# Altium PCB M2maleDouble_M2female.PcbDoc
Units mm, origin at the board's own origin, x right, y up, seen from the top; angles counter-clockwise.
Board outline 46 x 80 mm, 2 copper layers (Top Layer, Bottom Layer), stack 0.87 mm thick; 3 components, 15 nets, 208 pads, 217 vias.
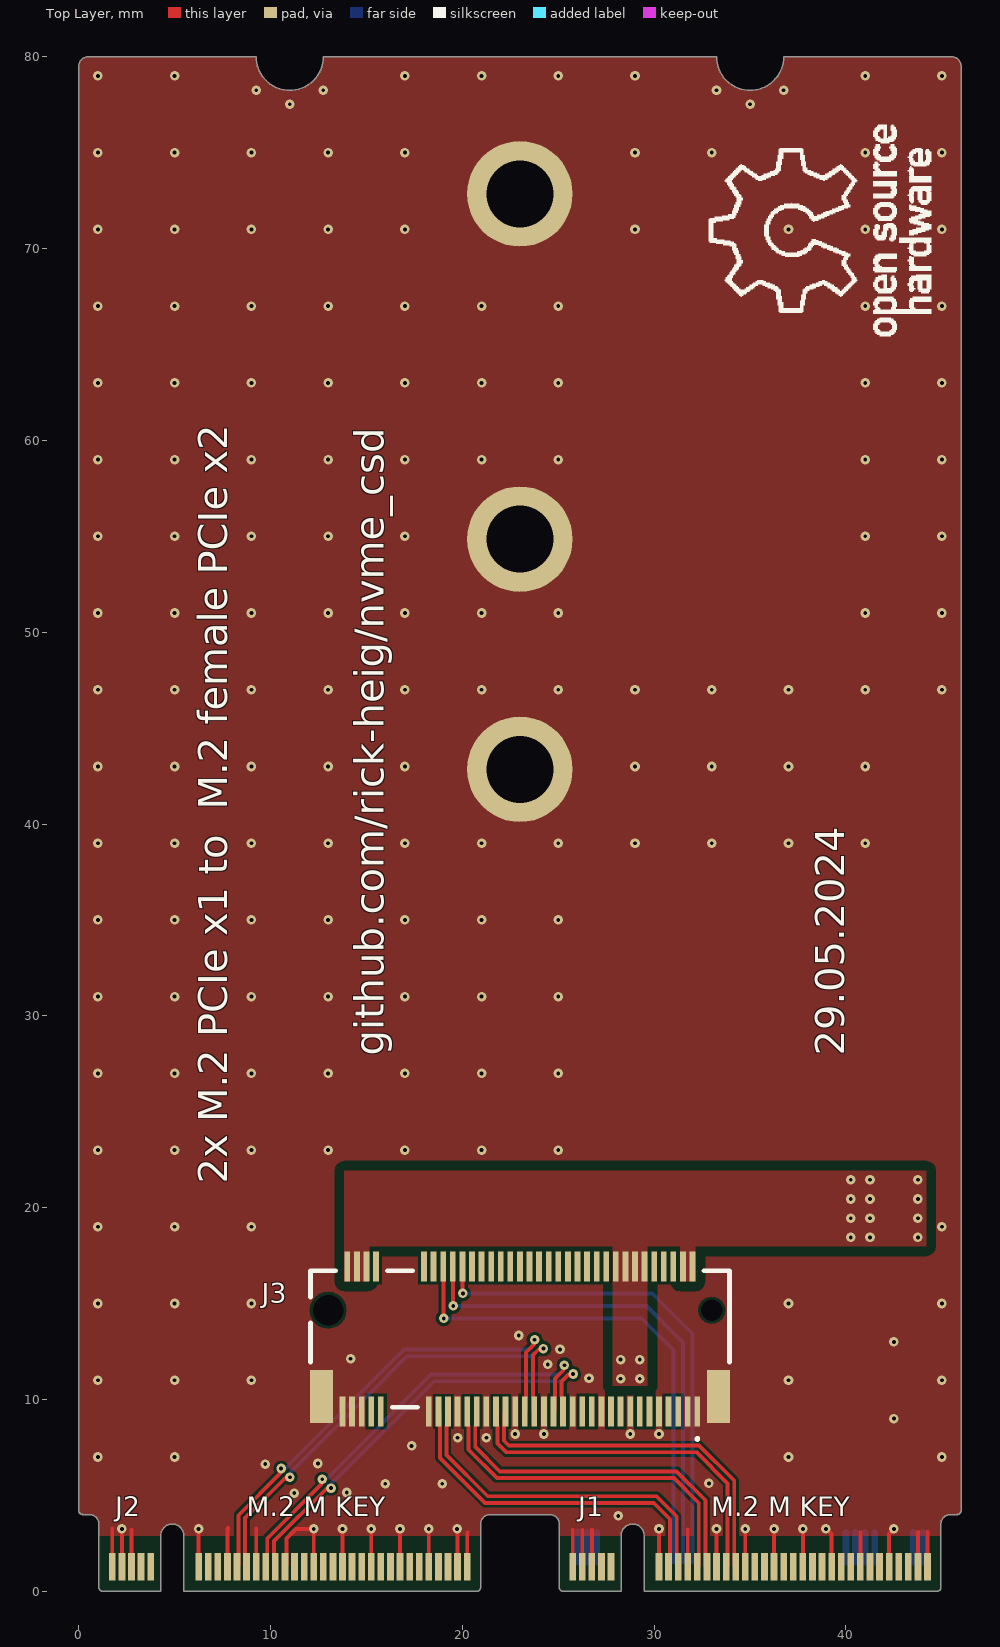
[diagram p0: Top Layer view]
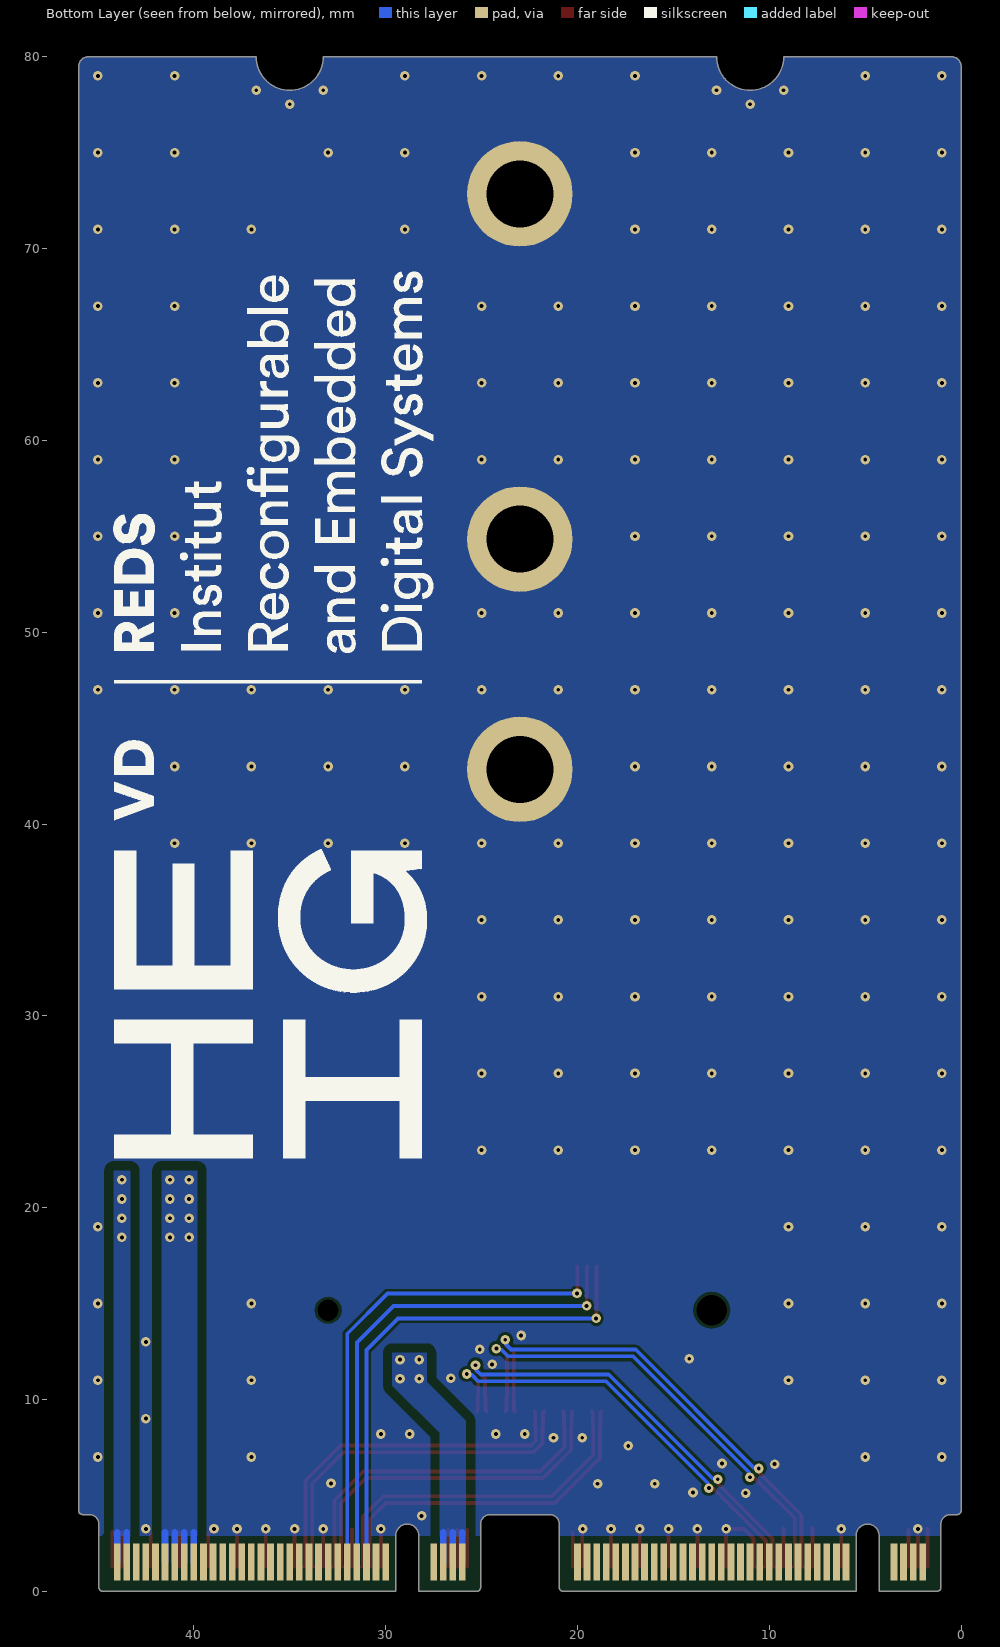
[diagram p1: Bottom Layer view, seen from below]

## Layer stack, top to bottom
Top Solder: solder mask 0.0254, Solder Resist, Dk 3.5
Top Layer: signal copper 0.035
Dielectric 1: dielectric 0.8, FR-4, Dk 4.8
Bottom Layer: signal copper 0.035
Bottom Solder: solder mask 0.0254, Solder Resist, Dk 3.5

## Board outline
1.05,0.2 ccw(c1.25,0.2) 1.25,0 4.275,0 4.275,2.9 cw(c4.875,2.9) 4.875,3.5 cw(c4.875,2.9) 5.475,2.9 5.475,0 20.75,0 ccw(c20.75,0.2) 20.95,0.2 20.95,3.5 cw(c21.45,3.5) 21.45,4 24.55,4 cw(c24.55,3.5) 25.05,3.5 25.05,0.2 ccw(c25.25,0.2) 25.25,0 28.275,0 28.275,2.9 cw(c28.875,2.9) 28.875,3.5 cw(c28.875,2.9) 29.475,2.9 29.475,0 44.75,0 ccw(c44.75,0.2) 44.95,0.2 44.95,3.5 cw(c45.45,3.5) 45.45,4 45.8,4 ccw(c45.8,4.2) 46,4.2 46,79.5 ccw(c45.5,79.5) 45.5,80 36.75,80 cw(c35,80) 33.25,80 12.75,80 cw(c11,80) 9.25,80 0.5,80 ccw(c0.5,79.5) 0,79.5 0,4.2 ccw(c0.2,4.2) 0.2,4 0.55,4 cw(c0.55,3.5) 1.05,3.5

## Design rules (kind name [scope] priority, off if disabled: settings)
BoardOutlineClearance [All] p1: gap=0 ignorepadtopadclearanceinfootprint=FALSE
Clearance Clearance_1 [All] p1: gap=0.15 ignorepadtopadclearanceinfootprint=FALSE except(0.149: Track-SMDPad SMDPad-SMDPad SMDPad-Poly; 0.5: Poly-Poly)
Clearance Clearance_DIFF [InAnyDifferentialPair] p2: gap=0.15 ignorepadtopadclearanceinfootprint=FALSE
Clearance Clearance_TOP [InNamedPolygon('GND-TOP')] p3: gap=0.15 ignorepadtopadclearanceinfootprint=FALSE
Clearance Clearance_BOTTOM [InNamedPolygon('GND-BOTTOM')] p4: gap=0.15 ignorepadtopadclearanceinfootprint=FALSE
ComponentClearance [All] p1: gap=0.254 collisioncheckmode=3 verticalgap=0.254 showdistances=FALSE donotcheckwithout3dbody=TRUE
DiffPairsRouting [All] p1: maxlimit=0.15 minlimit=0.15 mostfreqgap=0.15 toplayer_minwidth=0.2 toplayer_maxwidth=0.2 toplayer_prefwidth=0.2 bottomlayer_minwidth=0.2 bottomlayer_maxwidth=0.2 bottomlayer_prefwidth=0.2 impedanceprofiledriven=TRUE impedanceprofileid={70AA0EFC-7519-4A6E-A40E-C9539EC47755} impedanceprofilevalue=100.000000 maxuncoupledlength=12.7
HoleSize [All] p1: absolutevalues=TRUE maxlimit=5 minlimit=0.025 maxpercent=80.000 minpercent=20.000
HoleToHoleClearance [All] p1: gap=0.15 allowstackedmicrovias=TRUE
Length [All] p1: maxlimit=2540 minlimit=0
MatchedLengths MatchLengths_xSignals_J2_J1 [All] p1: tolerance=0.05 checknetsindiffpair=TRUE checkdiffpairvsdiffpair=FALSE checkxsignals=FALSE checkothers=FALSE
MinimumSolderMaskSliver [All] p1: minsoldermaskwidth=0.075
PlaneConnect [All] p1: planeconnectstyle=Direct reliefexpansion=0.508 reliefentries=4 reliefconductorwidth=0.254 reliefairgap=0.254
PolygonConnect PolygonConnect_6 [All vs IsNamedPolygon('Top-3.3V')] p1: connectstyle=Direct reliefconductorwidth=0.254 reliefentries=4 polygonreliefangle="90 Angle" airgapwidth=0.254
PolygonConnect PolygonConnect_5 [All vs IsNamedPolygon('Top-GND')] p2: connectstyle=Direct reliefconductorwidth=0.254 reliefentries=4 polygonreliefangle="90 Angle" airgapwidth=0.254
PolygonConnect PolygonConnect_4 [All vs IsNamedPolygon('Bottom-3.3V-003')] p3: connectstyle=Direct reliefconductorwidth=0.254 reliefentries=4 polygonreliefangle="90 Angle" airgapwidth=0.254
PolygonConnect PolygonConnect_3 [All vs IsNamedPolygon('Bottom-3.3V-002')] p4: connectstyle=Direct reliefconductorwidth=0.254 reliefentries=4 polygonreliefangle="90 Angle" airgapwidth=0.254
PolygonConnect PolygonConnect_2 [All vs IsNamedPolygon('Bottom-GND')] p5: connectstyle=Direct reliefconductorwidth=0.254 reliefentries=4 polygonreliefangle="90 Angle" airgapwidth=0.254
PolygonConnect PolygonConnect_1 [All vs IsNamedPolygon('Bottom-3.3V-001')] p6: connectstyle=Direct reliefconductorwidth=0.254 reliefentries=4 polygonreliefangle="90 Angle" airgapwidth=0.254
PolygonConnect [All] p7: connectstyle=Relief reliefconductorwidth=0.254 reliefentries=4 polygonreliefangle="90 Angle" airgapwidth=0.254
RoutingVias [All] p1: holewidth=0.2 width=0.5 viastyle="Through Hole" minholewidth=0.15 minwidth=0.4 maxholewidth=0.4 maxwidth=0.8
SilkToSolderMaskClearance [IsPad] p1: minsilkscreentomaskgap=0.2 clearancetoexposedcopper=TRUE
SolderMaskExpansion [All] p1: expansion=0.102 istentingtop=FALSE
SupplyNets "Schematic Supply Nets_1" [InNet('3.3V')] p1: voltage=0.000
SupplyNets "Schematic Supply Nets" [InNet('GND')] p2: voltage=0.000
Width [All] p1: maxlimit=0.4 minlimit=0.1 preferedwidth=0.2
23 further rules are at their usual default settings.

## Classes and differential pairs
differential pair PET1: +PET1_P -PET1_N
differential pair PET0: +PET0_P -PET0_N
differential pair PER1: +PER1_P -PER1_N
differential pair PER0: +PER0_P -PER0_N
differential pair CLK: +CLK_P -CLK_N

## Components (designator, comment, footprint, x,y, rotation, side; value= is the part's Value field where it differs from the comment)
J1 "NGFF_M_V2" M.2-M-KEY-2280-V2 35,0 r0 top
J2 "NGFF_M_V2" M.2-M-KEY-2280-V2 11,0 r0 top locked
J3 "APCI0113-P001A" APCI0113P001A 23,13.15 r180 top locked

## Footprints (in the part's own frame and the unit in brackets; to place one, negate y for a bottom-side part, rotate by r counter-clockwise, add the part's x,y. Pads: shape width x height; smd on the part's side, far side on the other; paste and mask are expansions set on the pad)
APCI0113P001A [mm]
  rect 0.3x1.55 smd paste+0 mask+0.051: 1(-9.25,3.775) 2(-9,-3.775) 3(-8.75,3.775) 4(-8.5,-3.775) 5(-8.25,3.775) 6(-8,-3.775) 7(-7.75,3.775) 8(-7.5,-3.775) 9(-7.25,3.775) 10(-7,-3.775) 11(-6.75,3.775) 12(-6.5,-3.775) 13(-6.25,3.775) 14(-6,-3.775) 15(-5.75,3.775) 16(-5.5,-3.775) 17(-5.25,3.775) 18(-5,-3.775) 19(-4.75,3.775) 20(-4.5,-3.775) 21(-4.25,3.775) 22(-4,-3.775) 23(-3.75,3.775) 24(-3.5,-3.775) 25(-3.25,3.775) 26(-3,-3.775) 27(-2.75,3.775) 28(-2.5,-3.775) 29(-2.25,3.775) 30(-2,-3.775) 31(-1.75,3.775) 32(-1.5,-3.775) 33(-1.25,3.775) 34(-1,-3.775) 35(-0.75,3.775) 36(-0.5,-3.775) 37(-0.25,3.775) 38(0,-3.775) 39(0.25,3.775) 40(0.5,-3.775) 41(0.75,3.775) 42(1,-3.775) 43(1.25,3.775) 44(1.5,-3.775) 45(1.75,3.775) 46(2,-3.775) 47(2.25,3.775) 48(2.5,-3.775) 49(2.75,3.775) 50(3,-3.775) 51(3.25,3.775) 52(3.5,-3.775) 53(3.75,3.775) 54(4,-3.775) 55(4.25,3.775) 56(4.5,-3.775) 57(4.75,3.775) 58(5,-3.775) 67(7.25,3.775) 68(7.5,-3.775) 69(7.75,3.775) 70(8,-3.775) 71(8.25,3.775) 72(8.5,-3.775) 73(8.75,3.775) 74(9,-3.775) 75(9.25,3.775)
  round 0.55 hole 1.1 unplated: MH1(-10,-1.5)
  round 0.8 hole 1.6 unplated: MH2(10,-1.5)
  rect 1.2x2.75 smd paste+0 mask+0.051: MP1(-10.35,3) MP2(10.35,3)
  silkscreen extent -10.92,-3.56 10.92,5.26
M.2-M-KEY-2280-V2 [mm] "M.2-KEY-M"
  rect 0.35x1.45 smd mask+0: 1(9.25,1.275) 3(8.75,1.275) 5(8.25,1.275) 7(7.75,1.275) 9(7.25,1.275) 11(6.75,1.275) 13(6.25,1.275) 15(5.75,1.275) 17(5.25,1.275) 19(4.75,1.275) 21(4.25,1.275) 23(3.75,1.275) 25(3.25,1.275) 27(2.75,1.275) 29(2.25,1.275) 31(1.75,1.275) 33(1.25,1.275) 35(0.75,1.275) 37(0.25,1.275) 39(-0.25,1.275) 41(-0.75,1.275) 43(-1.25,1.275) 45(-1.75,1.275) 47(-2.25,1.275) 49(-2.75,1.275) 51(-3.25,1.275) 53(-3.75,1.275) 55(-4.25,1.275) 57(-4.75,1.275) 67(-7.25,1.275) 69(-7.75,1.275) 71(-8.25,1.275) 73(-8.75,1.275) 75(-9.25,1.275)
  rect 0.35x1.95 smd far side mask+0: 2(9,1.525) 4(8.5,1.525) 6(8,1.525) 8(7.5,1.525) 10(7,1.525) 12(6.5,1.525) 14(6,1.525) 16(5.5,1.525) 18(5,1.525) 20(4.5,1.525) 22(4,1.525) 24(3.5,1.525) 26(3,1.525) 28(2.5,1.525) 30(2,1.525) 32(1.5,1.525) 34(1,1.525) 36(0.5,1.525) 38(0,1.525) 40(-0.5,1.525) 42(-1,1.525) 44(-1.5,1.525) 46(-2,1.525) 48(-2.5,1.525) 50(-3,1.525) 52(-3.5,1.525) 54(-4,1.525) 56(-4.5,1.525) 58(-5,1.525) 68(-7.5,1.525) 70(-8,1.525) 72(-8.5,1.525) 74(-9,1.525)

## Part data
J3: "Connector", Manufacturer_Name=LOTES, Datasheet Link=https://www.lcsc.com/datasheet/lcsc_datasheet_2010161204_LOTES-APCI0113-P001A_C841669.pdf, Height=4.8mm, Manufacturer_Part_Number=APCI0113-P001A

## Free pads (board coordinates)
  round 5.5 hole 3.5: 2(23,42.85) 2(23,54.85) 2(23,72.85)

## Via types
v1: diameter 0.5, hole 0.2, Top Layer to Bottom Layer, tented both sides, 217 vias

## Nets (pads, with @x,y where several pads share a name; then routed paths per layer and width w, separated by ;. In a path a pad name is that pad's centre, name@x,y a point inside that pad or via, vN(x,y) a via of type N, cw(c..) or ccw(c..) an arc to the next point about the centre after c; other vN are vias at no path point)
3.3V: J1.2 J1.4 J1.12 J1.14 J1.16 J1.18 J1.70 J1.72 J1.74 J3.2 J3.4 J3.12 J3.14 J3.16 J3.18 J3.70 J3.72 J3.74 | length 13.9
  Bottom Layer w0.35: J1.74 26,3.075 ; J1.72 26.5,3.075 ; J1.70 27,3.075 ; J1.18 40,3.075 ; J1.16 40.5,3.075 ; J1.14 41,3.075 ; J1.12 41.5,3.075 ; J1.4 43.5,3.075 ; J1.2 44,3.075
  other v1: 28.25,11.075 29.25,11.075 28.25,12.075 29.25,12.075 40.25,18.45 41.25,18.45 43.75,18.45 40.25,19.45 41.25,19.45 43.75,19.45 40.25,20.45 41.25,20.45 43.75,20.45 40.25,21.45 41.25,21.45 43.75,21.45
CLK_N: J1.53 J3.53 | length 18.3
  Top Layer w0.2: J3.53 19.2,9.325 19.2,8.608 19.175,8.583 19.175,7.1 21.325,4.95 30.125,4.95 31.178,3.897 31.178,2.827 31.175,2.824 31.175,2.104 31.175,1.35 J1.53
CLK_P: J1.55 J3.55 | length 18.3
  Top Layer w0.2: J3.55 18.8,9.325 18.8,8.608 18.825,8.583 18.825,6.955 21.18,4.6 29.98,4.6 30.828,3.753 30.828,2.972 30.825,2.969 30.825,2.104 30.825,1.35 J1.55
CLKREQ: J1.52 J3.52 | length 26.3
  Top Layer w0.2: J3.52 19.513,16.912 19.513,14.887 v1(19.525,14.875)
  Bottom Layer w0.2: v1(19.525,14.875) 29.6,14.875 31.5,12.975 J1.52
GND: J1.1 J1.3 J1.9 J1.15 J1.21 J1.27 J1.33 J1.39 J1.45 J1.51 J1.57 J1.71 J1.73 J1.75 J2.1 J2.3 J2.9 J2.15 J2.21 J2.27 J2.33 J2.39 J2.45 J2.51 J2.57 J2.71 J2.73 J2.75 J3.1 J3.3 J3.9 J3.15 J3.21 J3.27 J3.33 J3.39 J3.45 J3.51 J3.57 J3.71 J3.73 J3.75 J3.MP1 J3.MP2 pad.2 | length 55.5
  Top Layer w0.2: J2.75 1.75,3.275 ; J2.73 2.25,3.15 v1@2.275,3.175 ; J2.71 2.75,3.2 ; v1@6.2,3.425 6.25,3.375 J2.57 ; J2.51 7.75,3.25 7.775,3.275 7.775,3.3 ; J2.45 9.25,3.275 ; J2.39 10.825,1.35 10.825,2.75 11.325,3.25 v1(12.25,3.25) J2.33 ; J2.27 v1@13.75,3.275 ; v1@15.225,3.225 15.25,3.2 J2.21 ; v1@16.65,3.1 16.75,3 J2.15 ; J2.9 v1@18.25,3.125 ; v1@19.725,3.125 19.75,3.1 J2.3 ; J2.1 20.25,3.05 20.275,3.075 ; J1.75 25.75,3.2 ; J1.73 26.25,3.2 ; J1.71 26.75,3.2 ; v1@30.175,3.2 30.25,3.125 J1.57 ; J1.51 31.75,3.225 ; J1.45 v1@33.25,3.25 ; v1@34.65,3.15 34.75,3.05 J1.39 ; J1.33 v1@36.25,3.15 ; J1.27 v1@37.75,3.2 ; v1(38.95,3.25) 38.983,3.25 39.25,2.983 J1.21 ; J1.15 40.75,3.075 ; J1.9 42.25,2.983 42.5,3.233 v1(42.5,3.25) ; J1.3 43.75,3.1 ; J1.1 44.25,3.1
  other v1: 2.25,3.25 6.25,3.25 13.75,3.25 15.25,3.25 16.75,3.25 18.25,3.25 19.725,3.25 30.25,3.25 33.25,3.25 34.75,3.25 36.25,3.25 37.75,3.25 28.125,3.925 11.235,5.115 13.975,5.15 15.975,5.6 18.95,5.6 32.85,5.625 9.725,6.625 12.465,6.66 1,7 5,7 37,7 45,7 17.35,7.575 19.75,8 21.25,8 22.75,8.2 24.25,8.2 28.75,8.2 30.25,8.2 42.5,9 1,11 5,11 9,11 37,11 45,11 26.6,11.1 24.45,11.825 14.175,12.125 25.09,12.61 42.5,13 22.94,13.335 1,15 5,15 9,15 37,15 45,15 1,19 5,19 9,19 45,19 1,23 5,23 9,23 13,23 17,23 21,23 25,23 1,27 5,27 9,27 13,27 17,27 21,27 25,27 1,31 5,31 9,31 13,31 17,31 21,31 25,31 1,35 5,35 9,35 13,35 17,35 21,35 25,35 1,39 5,39 9,39 13,39 17,39 21,39 25,39 29,39 33,39 37,39 41,39 1,43 5,43 9,43 13,43 17,43 29,43 33,43 37,43 41,43 1,47 5,47 9,47 13,47 17,47 21,47 25,47 29,47 33,47 37,47 41,47 45,47 1,51 5,51 9,51 13,51 17,51 21,51 25,51 41,51 45,51 1,55 5,55 9,55 13,55 17,55 41,55 45,55 1,59 5,59 9,59 13,59 17,59 21,59 25,59 41,59 45,59 1,63 5,63 9,63 13,63 17,63 21,63 25,63 41,63 45,63 1,67 5,67 9,67 13,67 17,67 21,67 25,67 41,67 45,67 1,71 5,71 9,71 13,71 17,71 29,71 37,71 41,71 45,71 1,75 5,75 9,75 13,75 17,75 29,75 33,75 41,75 45,75 11,77.525 35,77.525 9.25,78.25 12.75,78.25 33.25,78.25 36.75,78.25 1,79 5,79 17,79 21,79 25,79 29,79 41,79 45,79
PER0_N: J1.41 J3.41 | length 18.9
  Top Layer w0.2: J3.41 22.2,9.325 22.2,8.608 22.175,8.583 22.175,7.845 22.42,7.6 32.345,7.6 34.175,5.77 34.175,2.104 ; 34.175,2.104 34.175,1.35 J1.41
PER0_P: J1.43 J3.43 | length 18.9
  Top Layer w0.2: J3.43 21.8,9.325 21.8,8.608 21.825,8.583 21.825,7.7 22.275,7.25 32.2,7.25 33.825,5.625 33.825,2.104 33.825,1.35 J1.43
PER1_N: J2.41 J3.29 | length 22.2
  Top Layer w0.2: J2.41 10.175,1.35 10.175,2.104 10.175,2.612 12.88,5.318 ; J3.29 25.2,9.425 25.2,10.142 25.175,10.167 25.175,10.937 25.505,11.268
  Bottom Layer w0.2: 13.207,5.645 18.513,10.95 25.188,10.95 25.505,11.268 25.718,11.268 v1(25.775,11.325)
  other v1: 13.15,5.375
PER1_P: J2.43 J3.31 | length 22.8
  Top Layer w0.2: J2.43 9.825,1.35 9.825,2.104 9.825,2.757 12.633,5.565 ; J3.31 24.8,9.425 24.8,10.142 24.825,10.167 24.825,11.082 25.258,11.515
  Bottom Layer w0.2: 12.96,5.892 18.368,11.3 25.043,11.3 25.258,11.515 25.258,11.727 v1(25.315,11.785)
  other v1: 12.69,5.835
PERST: J1.50 J3.50 | length 26.2
  Top Layer w0.2: J3.50 20.013,16.912 20.013,15.537 v1(20.025,15.525)
  Bottom Layer w0.2: v1(20.025,15.525) 29.9,15.525 32,13.425 J1.50
PET0_N: J1.47 J3.47 | length 18.5
  Top Layer w0.2: J3.47 20.7,9.325 20.7,8.608 20.675,8.583 20.675,7.52 21.945,6.25 31.17,6.25 32.675,4.745 32.675,2.017 32.675,1.35 J1.47
PET0_P: J1.49 J3.49 | length 18.5
  Top Layer w0.2: J3.49 20.3,9.325 20.3,8.608 20.325,8.583 20.325,7.375 21.8,5.9 31.025,5.9 32.325,4.6 32.325,2.017 32.325,1.35 J1.49
PET1_N: J2.47 J3.35 | length 25.3
  Top Layer w0.2: J2.47 8.675,1.35 8.675,2.017 8.675,3.818 10.74,5.883 10.952,5.883 v1(11.01,5.94) ; J3.35 23.7,9.425 23.7,10.142 23.675,10.167 23.675,12.312 23.955,12.593
  Bottom Layer w0.2: v1(11.01,5.94) 11.067,5.998 11.067,6.21 15.416,10.559 16.804,11.946 17.107,12.25 23.613,12.25 23.955,12.593 24.168,12.593 v1(24.225,12.65)
PET1_P: J2.49 J3.37 | length 25.9
  Top Layer w0.2: J2.49 8.325,1.35 8.325,2.017 8.325,3.963 10.493,6.13 10.493,6.343 v1(10.55,6.4) ; J3.37 23.3,9.425 23.3,10.142 23.325,10.167 23.325,12.457 23.708,12.84
  Bottom Layer w0.2: v1(10.55,6.4) 10.607,6.457 10.82,6.457 16.962,12.6 23.468,12.6 23.708,12.84 23.708,13.052 v1(23.765,13.11)
PEWAKE: J1.54 J3.54 | length 26.4
  Top Layer w0.2: J3.54 19.013,16.912 19.013,14.237 v1(19.025,14.225)
  Bottom Layer w0.2: v1(19.025,14.225) 29.35,14.225 31,12.575 J1.54
pads on no net: J1.5 J1.6 J1.7 J1.8 J1.10 J1.11 J1.13 J1.17 J1.19 J1.20 J1.22 J1.23 J1.24 J1.25 J1.26 J1.28 J1.29 J1.30 J1.31 J1.32 J1.34 J1.35 J1.36 J1.37 J1.38 J1.40 J1.42 J1.44 J1.46 J1.48 J1.56 J1.58 J1.67 J1.68 J1.69 J2.2 J2.4 J2.5 J2.6 J2.7 J2.8 J2.10 J2.11 J2.12 J2.13 J2.14 J2.16 J2.17 J2.18 J2.19 J2.20 J2.22 J2.23 J2.24 J2.25 J2.26 J2.28 J2.29 J2.30 J2.31 J2.32 J2.34 J2.35 J2.36 J2.37 J2.38 J2.40 J2.42 J2.44 J2.46 J2.48 J2.50 J2.52 J2.53 J2.54 J2.55 J2.56 J2.58 J2.67 J2.68 J2.69 J2.70 J2.72 J2.74 J3.5 J3.6 J3.7 J3.8 J3.10 J3.11 J3.13 J3.17 J3.19 J3.20 J3.22 J3.23 J3.24 J3.25 J3.26 J3.28 J3.30 J3.32 J3.34 J3.36 J3.38 J3.40 J3.42 J3.44 J3.46 J3.48 J3.56 J3.58 J3.67 J3.68 J3.69 J3.MH1 J3.MH2

## Polygon pours and split planes (outlines as drawn)
no net on Bottom Solder "BS-GND-001" (solid, pour order 22): 13.85,80 cw(c11,80) 8.15,80 9.25,80 ccw(c11,80) 12.75,80
no net on Bottom Solder "BS-GND-001" (solid, pour order 21): 37.85,80 cw(c35,80) 32.15,80 33.25,80 ccw(c35,80) 36.75,80
no net on Top Solder "TS-GND-001" (solid, pour order 19): 37.85,80 cw(c35,80) 32.15,80 33.25,80 ccw(c35,80) 36.75,80
no net on Top Solder "TS-GND-001" (solid, pour order 20): 13.85,80 cw(c11,80) 8.15,80 9.25,80 ccw(c11,80) 12.75,80
3.3V on Bottom Layer "Bottom-3.3V-001" (solid, pour order 17): 39.825,2.9 39.825,21.925 41.675,21.925 41.675,2.9
3.3V on Bottom Layer "Bottom-3.3V-002" (solid, pour order 16): 43.325,2.9 43.325,21.925 44.175,21.925 44.175,2.9
3.3V on Bottom Layer "Bottom-3.3V-003" (solid, pour order 15): 25.825,2.875 25.825,8.9 27.847,10.922 27.847,12.425 29.65,12.425 29.65,10.725 27.175,8.25 27.175,2.875
GND on Bottom Layer "Bottom-GND" (solid, remove dead copper, pour order 18): 1.05,2.9 4.275,2.9 cw(c4.875,2.9) 4.875,3.5 cw(c4.875,2.9) 5.475,2.9 20.95,2.9 20.95,3.5 cw(c21.45,3.5) 21.45,4 24.55,4 cw(c24.55,3.5) 25.05,3.5 25.05,2.9 28.275,2.9 cw(c28.875,2.9) 28.875,3.5 cw(c28.875,2.9) 29.475,2.9 44.95,2.9 44.95,3.5 cw(c45.45,3.5) 45.45,4 45.8,4 ccw(c45.8,4.2) 46,4.2 46,79.5 ccw(c45.5,79.5) 45.5,80 36.75,80 cw(c35,80) 33.25,80 23.042,80 12.75,80 cw(c11,80) 9.25,80 0.5,80 ccw(c0.5,79.5) 0,79.5 0,4.2 ccw(c0.2,4.2) 0.2,4 0.55,4 cw(c0.55,3.5) 1.05,3.5
3.3V on Top Layer "Top-3.3V" (solid, pour order 13): 27.85,10.725 29.65,10.725 29.65,17.975 31.35,17.975 31.35,16.15 32.15,16.15 32.15,17.975 44.175,17.975 44.175,21.925 13.85,21.925 13.85,18.275 13.85,16.15 15.15,16.15 15.15,17.975 16.125,17.975 17.425,17.975 27.85,17.975
GND on Top Layer "Top-GND" (solid, pour order 14): 1.05,2.9 4.275,2.9 cw(c4.875,2.9) 4.875,3.5 cw(c4.875,2.9) 5.475,2.9 20.95,2.9 20.95,3.5 cw(c21.45,3.5) 21.45,4 24.55,4 cw(c24.55,3.5) 25.05,3.5 25.05,2.9 28.275,2.9 cw(c28.875,2.9) 28.875,3.5 cw(c28.875,2.9) 29.475,2.9 44.95,2.9 44.95,3.5 cw(c45.45,3.5) 45.45,4 45.8,4 ccw(c45.8,4.2) 46,4.2 46,79.5 ccw(c45.5,79.5) 45.5,80 36.75,80 cw(c35,80) 33.25,80 23.042,80 12.75,80 cw(c11,80) 9.25,80 0.5,80 ccw(c0.5,79.5) 0,79.5 0,4.2 ccw(c0.2,4.2) 0.2,4 0.55,4 cw(c0.55,3.5) 1.05,3.5

## Silkscreen, mask and mechanical layers (free items; w line width, h text height)
Top Overlay:
  drawing of 18 lines, arcs and shapes, not listed
  text "github.com/rick-heig/nvme_csd" at 15.888,27.929 h1.52 r90
  text "29.05.2024" at 39.921,27.929 h1.52 r90
  text "2x M.2 PCIe x1 to  M.2 female PCIe x2" at 7.746,21.254 h1.52 r90
  text "M.2 M KEY" at 8.75,3.9 h1
  text "M.2 M KEY" at 32.986,3.9 h1
Bottom Overlay:
  drawing of 61 lines, arcs and shapes, not listed
Mechanical 1:
  the board outline again, w0.2